# EAGLE board CT_schematic (EAGLE 7.6.0)

Size 100 x 80 mm. Coordinates in mm from the lower left corner, seen from the top.
Outline: 0,0 100,0 100,80 0,80 0,0
Copper layers (1*16): Top 0.035mm / dielectric 1.5mm / Bottom 0.035mm
Design rules "default": minimum track width 10mil, minimum drill 24mil, track to track 8mil, track to pad 8mil, pad to pad 8mil, via to via 8mil, smd to smd 8mil, copper to edge 40mil, drill to drill 8mil, minimum pad ring 10mil, minimum via ring 8mil, stop-mask expansion 4mil, vias tented up to drill 0mil, thermal gap 10mil

## Footprints (pad centres in the part's own frame; a part is rotated, then mirrored left to right if it is on the bottom)
C0603 = smd 0.8 x 0.8: 1 -0.762,0; 2 0.762,0
C0402 = smd 0.5 x 0.5: 1 -0.508,0; 2 0.508,0
C1210 = smd 1.2 x 2.5: 1 -1.524,0; 2 1.524,0
C0805 = smd 1.2 x 1.3: 1 -1.016,0; 2 1.016,0
EXV-9B = smd 2.718 x 1.778: 1 -2.108,0; 2 2.108,0
R0603 = smd 0.8 x 0.8: 1 -0.762,0; 2 0.762,0
EXV-9H = smd 3.505 x 1.676: 1 -2.857,0; 2 2.857,0
PJ-037B_PACKAGE = drill 3.7 square: 1 12,0 | drill 3.2 square: 2 6,0
WLCSP64 = smd 0.34 x 0.34: A1 -1.75,1.75; A2 -1.25,1.75; A3 -0.75,1.75; A4 -0.25,1.75; A5 0.25,1.75; A6 0.75,1.75; A7 1.25,1.75; A8 1.75,1.75; B1 -1.75,1.25; B2 -1.25,1.25; B3 -0.75,1.25; B4 -0.25,1.25; B5 0.25,1.25; B6 0.75,1.25; B7 1.25,1.25; B8 1.75,1.25; C1 -1.75,0.75; C2 -1.25,0.75; C3 -0.75,0.75; C4 -0.25,0.75; C5 0.25,0.75; C6 0.75,0.75; C7 1.25,0.75; C8 1.75,0.75; D1 -1.75,0.25; D2 -1.25,0.25; D3 -0.75,0.25; D4 -0.25,0.25; D5 0.25,0.25; D6 0.75,0.25; D7 1.25,0.25; D8 1.75,0.25; E1 -1.75,-0.25; E2 -1.25,-0.25; E3 -0.75,-0.25; E4 -0.25,-0.25; E5 0.25,-0.25; E6 0.75,-0.25; E7 1.25,-0.25; E8 1.75,-0.25; F1 -1.75,-0.75; F2 -1.25,-0.75; F3 -0.75,-0.75; F4 -0.25,-0.75; F5 0.25,-0.75; F6 0.75,-0.75; F7 1.25,-0.75; F8 1.75,-0.75; G1 -1.75,-1.25; G2 -1.25,-1.25; G3 -0.75,-1.25; G4 -0.25,-1.25; G5 0.25,-1.25; G6 0.75,-1.25; G7 1.25,-1.25; G8 1.75,-1.25; H1 -1.75,-1.75; H2 -1.25,-1.75; H3 -0.75,-1.75; H4 -0.25,-1.75; H5 0.25,-1.75; H6 0.75,-1.75; H7 1.25,-1.75; H8 1.75,-1.75
SOIC-8 = smd 1.6 x 0.6: 1 -2.7,1.905 | smd 1.55 x 0.6: 2 -2.7,0.635; 3 -2.7,-0.635; 4 -2.7,-1.905; 5 2.7,-1.905; 6 2.7,-0.635; 7 2.7,0.635; 8 2.7,1.905
182-009-MALE = drill 1.194 pad 1.524 octagon: 1 -5.537,10.923; 2 -2.769,10.923; 3 0,10.923; 4 2.769,10.923; 5 5.537,10.923; 6 -4.153,8.08; 7 -1.384,8.08; 8 1.384,8.08; 9 4.153,8.08 | hole 3.048: -12.446,9.501; 12.446,9.501
SI7034-A10-IM = smd 0.75 x 0.4: 1 -1,0.5; 2 -1,-0.5; 4 1,-0.5; 5 1,0.5 | smd 0.8 x 1.7: 3 0,0
SMD-8 = smd 0.72 x 0.6: 1 -1.45,-0.7; 2 -0.485,-0.7; 3 0.485,-0.7; 4 1.455,-0.7; 5 1.455,0.7; 6 0.485,0.7; 7 -0.485,0.7; 8 -1.455,0.7
FCI_10118193-0001LF = smd 0.4 x 1.35: 1 -1.3,2.675; 2 -0.65,2.675; 3 0,2.675; 4 0.65,2.675; 5 1.3,2.675 | smd 1.6 x 1.4: 6 -3.2,2.45; 7 3.2,2.45 | smd 1.9 x 1.9: 8 -1.2,0; 9 1.2,0 | hole 0.5: -3.3,0; 3.3,0
SOT143B = smd 1 x 0.7: 1 -0.75,-1 | smd 0.6 x 0.7: 2 0.95,-1; 3 0.95,1; 4 -0.95,1
ASEK = smd 1.4 x 1: 1 -1.1,-0.8; 2 1.1,-0.8; 3 1.1,0.8; 4 -1.1,0.8
ASFL1 = smd 1.7 x 1.5: 1 -1.27,-1.1; 2 1.27,-1.1; 3 1.27,1.1; 4 -1.27,1.1
WSON-8 = smd 0.3 x 0.6: 1 -0.75,0; 2 0.05,0; 3 0.85,0; 4 1.65,0; 5 1.65,3.8; 6 0.85,3.8; 7 0.05,3.8; 8 -0.75,3.8 | smd 3 x 2.6: PAD 0.45,1.9
LP2954 = smd 1.6 x 0.6: 1 -2.475,1.905 | smd 1.55 x 0.6: 2 -2.475,0.635; 3 -2.475,-0.635; 4 -2.475,-1.905; 5 2.475,-1.905; 6 2.475,-0.635; 7 2.475,0.635; 8 2.475,1.905
SON-6 = smd 0.55 x 0.3: 1 -0.355,0.5 | smd 0.52 x 0.3: 2 -0.37,0; 3 -0.37,-0.5; 4 0.37,-0.5; 5 0.37,0; 6 0.37,0.5
DCU0008A_N = smd 0.5 x 0.3: 1 -1.6,0.75; 2 -1.6,0.25; 3 -1.6,-0.25; 4 -1.6,-0.75; 5 1.6,-0.75; 6 1.6,-0.25; 7 1.6,0.25; 8 1.6,0.75
SW_4-1437565-2 = smd 1.4 x 2.1: 1 -2.23,4.55; 2 -2.23,-4.55; 3 2.23,4.55; 4 2.23,-4.55
LGM67K-G1J2-24-Z = smd 0.8 x 1.4: A -2,0; C 0,0
NC7SZ125M5X = smd 1.3 x 0.7: 1 -1.3,0.95; 2 -1.3,0; 3 -1.3,-0.95; 4 1.3,-0.95; 5 1.3,0.95

## Placement (x,y rotation side)
C1  1e-06  [C0603]  -48.26,68.58 0 top  (outside the outline)
C2  1e-07  [C0603]  -52.07,68.58 0 top  (outside the outline)
C3  1e-07  [C0603]  -55.88,68.58 0 top  (outside the outline)
C4  1e-07  [C0603]  -59.69,68.58 0 top  (outside the outline)
C5  1e-07  [C0603]  -63.5,68.58 0 top  (outside the outline)
C6  1e-07  [C0603]  -67.31,68.58 0 top  (outside the outline)
C7  4.7e-06  [C0603]  -44.45,68.58 0 top  (outside the outline)
C8  1e-08  [C0603]  -71.12,68.58 0 top  (outside the outline)
C9  1e-06  [C0603]  -74.93,68.58 0 top  (outside the outline)
C10  1e-07  [C0603]  -15.24,73.66 0 top  (outside the outline)
C11  1e-06  [C0603]  -19.05,73.66 0 top  (outside the outline)
C12  1e-06  [C0603]  -22.86,73.66 0 top  (outside the outline)
C13  1e-07  [C0402]  -64.77,73.66 0 top  (outside the outline)
C14  1e-06  [C0603]  -26.67,73.66 0 top  (outside the outline)
C15  1e-06  [C0603]  -30.48,73.66 0 top  (outside the outline)
C16  1e-08  [C0402]  -68.58,73.66 0 top  (outside the outline)
C17  1e-08  [C0402]  -72.39,73.66 0 top  (outside the outline)
C18  1e-08  [C0402]  -15.24,78.74 0 top  (outside the outline)
C19  1e-05  [C1210]  -39.37,55.88 0 top  (outside the outline)
C20  1e-05  [C0805]  -21.59,63.5 0 top  (outside the outline)
C21  1e-06  [EXV-9B]  -53.34,55.88 0 top  (outside the outline)
C22  2.2e-06  [EXV-9B]  -62.23,55.88 0 top  (outside the outline)
C23  8e-07  [R0603]  -34.29,73.66 0 top  (outside the outline)
C24  1e-05  [C1210]  -45.72,55.88 0 top  (outside the outline)
C25  1e-07  [C0402]  -19.05,78.74 0 top  (outside the outline)
C26  0.0001  [EXV-9H]  -63.5,46.99 0 top  (outside the outline)
C27  0.0001  [EXV-9H]  -17.78,57.15 0 top  (outside the outline)
C28  1e-08  [C0402]  -22.86,78.74 0 top  (outside the outline)
C29  1e-07  [C0402]  -26.67,78.74 0 top  (outside the outline)
C30  1e-08  [C0402]  -30.48,78.74 0 top  (outside the outline)
C31  1e-07  [C0402]  -34.29,78.74 0 top  (outside the outline)
C32  1e-08  [C0402]  -38.1,78.74 0 top  (outside the outline)
J1  PJ-037B  [PJ-037B_PACKAGE]  -67.31,7.62 0 top  (outside the outline)
R2  1000.0  [R0603]  -38.1,73.66 0 top  (outside the outline)
R4  4700.0  [R0603]  -41.91,73.66 0 top  (outside the outline)
R5  2200.0  [R0603]  -45.72,73.66 0 top  (outside the outline)
R6  2200.0  [R0603]  -49.53,73.66 0 top  (outside the outline)
R9  10000.0  [R0603]  -20.32,68.58 0 top  (outside the outline)
R10  120.0  [R0603]  -53.34,73.66 0 top  (outside the outline)
R11  10000.0  [R0603]  -25.4,68.58 0 top  (outside the outline)
R12  100000.0  [R0603]  -31.75,63.5 0 top  (outside the outline)
R13  806.0  [R0603]  -57.15,73.66 0 top  (outside the outline)
R14  1000.0  [R0603]  -60.96,73.66 0 top  (outside the outline)
R15  100000.0  [R0603]  -36.83,63.5 0 top  (outside the outline)
R16  100000.0  [R0603]  -41.91,63.5 0 top  (outside the outline)
R17  164658.62  [R0603]  -26.67,63.5 0 top  (outside the outline)
R18  100000.0  [R0603]  -46.99,63.5 0 top  (outside the outline)
R19  100000.0  [R0603]  -52.07,63.5 0 top  (outside the outline)
R20  300000.0  [R0603]  -57.15,63.5 0 top  (outside the outline)
R21  100000.0  [R0603]  -62.23,63.5 0 top  (outside the outline)
R22  10000.0  [R0603]  -30.48,68.58 0 top  (outside the outline)
R23  10000.0  [R0603]  -35.56,68.58 0 top  (outside the outline)
R24  82000.0  [R0603]  -40.64,68.58 0 top  (outside the outline)
R25  300000.0  [R0603]  -67.31,63.5 0 top  (outside the outline)
R26  120000.0  [R0603]  -72.39,63.5 0 top  (outside the outline)
R27  200000.0  [R0603]  -15.24,68.58 0 top  (outside the outline)
U1  STM32L443RCY6  [WLCSP64]  -24.13,48.26 0 top  (outside the outline)
U2  MCP2562-E/SN  [SOIC-8]  -58.42,27.94 0 top  (outside the outline)
U3  182-009-113R531  [182-009-MALE]  -36.83,6.35 0 top  (outside the outline)
U4  Si7034-A10-IM  [SI7034-A10-IM]  -69.85,77.47 0 top  (outside the outline)
U5  TMD27711  [SMD-8]  -16.51,63.5 0 top  (outside the outline)
U6  10118193-0001LF  [FCI_10118193-0001LF]  -33.02,46.99 0 top  (outside the outline)
U7  prtr5v0u2ax  [SOT143B]  -50.8,78.74 0 top  (outside the outline)
U8  ASEK-32.768KHz-ECST  [ASEK]  -54.61,46.99 0 top  (outside the outline)
U9  ASFL1-25MHZ-NCS  [ASFL1]  -64.77,38.1 0 top  (outside the outline)
U10  LP3878SDX-ADJ/NOPB  [WSON-8]  -30.48,36.83 0 top  (outside the outline)
U11  LP2954AIMX/NOPB  [LP2954]  -44.45,27.94 0 top  (outside the outline)
U12  LP2951ACSDX/NOPB  [WSON-8]  -48.26,36.83 0 top  (outside the outline)
U13  TPS3895ADRYR  [SON-6]  -13.97,82.55 0 top  (outside the outline)
U14  LSF0102DCTR  [DCU0008A_N]  -63.5,77.47 0 top  (outside the outline)
U15  4-1437565-2  [SW_4-1437565-2]  -27.94,27.94 0 top  (outside the outline)
U16  Q65110A2395  [LGM67K-G1J2-24-Z]  -27.94,55.88 0 top  (outside the outline)
U17  nc7sz125m5x  [NC7SZ125M5X]  -69.85,54.61 0 top  (outside the outline)

## Library data of the parts
C1-C32 J1 R2 R4-R6 R9-R27 U1-U17 = circuit_tree

## Nets
CLK_U1_C8: U1.C8 U8.3
CLK_U1_D8: U1.D8 U9.3
GND: C1.2 C2.2 C3.2 C4.2 C5.2 C6.2 C7.2 C8.2 C9.2 C10.2 C11.2 C12.2 C13.2 C14.2 C15.2 C16.2 C17.2 C18.2 C19.2 C20.2 C21.2 C22.2 C23.2 C24.2 C25.2 C26.2 C27.2 C28.2 C29.2 C30.2 C31.2 C32.2 J1.2 R2.2 R9.2 R14.2 R18.2 R21.2 R24.2 R26.2 U1.A7 U1.B1 U1.F8 U1.H2 U1.H8 U2.2 U2.8 U3.5 U4.5 U5.3 U6.5 U6.6 U6.7 U6.8 U6.9 U7.1 U8.2 U9.2 U10.3 U10.PAD U11.4 U12.3 U12.4 U12.PAD U13.2 U14.1 U16.C U17.1 U17.3
NET_U1_A6: R6.1 U1.A6 U4.4
NET_U1_B5: R5.1 U1.B5 U4.2
NET_U1_C5: R9.1 U1.C5
NET_U1_D6: R4.1 U1.D6 U17.4
NET_U1_G1: U14.3
NET_U1_G2: U14.4
NET_U1_H5: U16.A
NET_U1_H6: U15.3 U15.4
NET_U2_6: R10.2 U2.6
NET_U3_2: R10.2 U2.6 U3.2
NET_U3_3: R10.1 U2.7 U3.3
NET_U5_5: U5.5
NET_U5_6: U5.6
NET_U5_7: R11.1 U5.7
NET_U7_4: U6.1 U7.4
NET_U10_1: C18.1 U10.1
NET_U10_6: R13.2 R14.1 U10.6
NET_U10_8: R12.1 U10.8
NET_U11_3: R16.1 U11.3
NET_U11_5: R15.1 U11.5
NET_U11_7: R17.2 R18.1 U11.7
NET_U12_5: R19.1 U12.5
NET_U12_7: R20.2 R21.1 U12.7
NET_U13_1: R23.1 R24.1 U13.1
NET_U13_3: R25.2 R26.1 U13.3
NET_U13_4: R22.1 U13.4 U17.2
NET_U14_8: R27.1 U14.8
NET_U15_1: R2.1 U15.1 U15.2
PROC_CAN1_RX: U1.C6 U2.4
PROC_CAN1_TX: U1.B6 U2.1
PROC_I2C2_SCL_TOXCVR: U5.2 U14.5
PROC_I2C2_SDA_TOXCVR: U5.8 U14.6
PROC_USB_DM: U1.D3 U6.2 U7.3
PROC_USB_DP: U1.C1 U6.3 U7.2
VCC_S1_15V9: C19.1 C21.1 C23.1 C26.1 C27.1 J1.1 R12.2 R16.2 U10.4 U11.8 U12.8
VCC_TIER1_1V8: C1.1 C2.1 C3.1 C4.1 C5.1 C6.1 C7.1 C12.1 C13.1 C20.1 C25.1 C30.1 C31.1 C32.1 R4.2 R5.2 R6.2 R13.1 R22.2 R23.2 R25.1 U1.A8 U1.B7 U1.H1 U1.H7 U2.5 U4.1 U10.5 U13.6 U14.2 U17.5
VCC_TIER1_3V3: C8.1 C9.1 C10.1 C14.1 C15.1 C16.1 C17.1 C22.1 C28.1 C29.1 R11.2 R15.2 R17.1 R27.2 U1.A1 U1.G8 U5.1 U5.4 U8.4 U9.4 U11.1 U14.7
VCC_TIER1_5V0: C11.1 C24.1 R19.2 R20.1 U2.3 U12.1

## Tracks (layer width: path | path; a pad name or v marks a point on that pad's centre or on a via)
CLK_U1_C8  (1 unrouted)
CLK_U1_D8  (1 unrouted)
GND  (68 unrouted)
NET_U1_A6  (2 unrouted)
NET_U1_B5  (2 unrouted)
NET_U1_C5  (1 unrouted)
NET_U1_D6  (2 unrouted)
NET_U1_H6  (1 unrouted)
NET_U2_6  (1 unrouted)
NET_U3_2  (2 unrouted)
NET_U3_3  (2 unrouted)
NET_U5_7  (1 unrouted)
NET_U7_4  (1 unrouted)
NET_U10_1  (1 unrouted)
NET_U10_6  (2 unrouted)
NET_U10_8  (1 unrouted)
NET_U11_3  (1 unrouted)
NET_U11_5  (1 unrouted)
NET_U11_7  (2 unrouted)
NET_U12_5  (1 unrouted)
NET_U12_7  (2 unrouted)
NET_U13_1  (2 unrouted)
NET_U13_3  (2 unrouted)
NET_U13_4  (2 unrouted)
NET_U14_8  (1 unrouted)
NET_U15_1  (2 unrouted)
PROC_CAN1_RX  (1 unrouted)
PROC_CAN1_TX  (1 unrouted)
PROC_I2C2_SCL_TOXCVR  (1 unrouted)
PROC_I2C2_SDA_TOXCVR  (1 unrouted)
PROC_USB_DM  (2 unrouted)
PROC_USB_DP  (2 unrouted)
VCC_S1_15V9  (10 unrouted)
VCC_TIER1_1V8  (30 unrouted)
VCC_TIER1_3V3  (21 unrouted)
VCC_TIER1_5V0  (5 unrouted)